# Altium PCB Connected_Cube.PcbDoc (part 2 of 4)
Units mil, origin at the board's own origin, x right, y up, seen from the top; angles counter-clockwise.
Board outline 4960.63 x 3700.79 mil, 4 copper layers (Top Layer, GND, Power, Bottom Layer), stack 47.164 mil thick; 209 components, 203 nets, 946 pads, 737 vias.
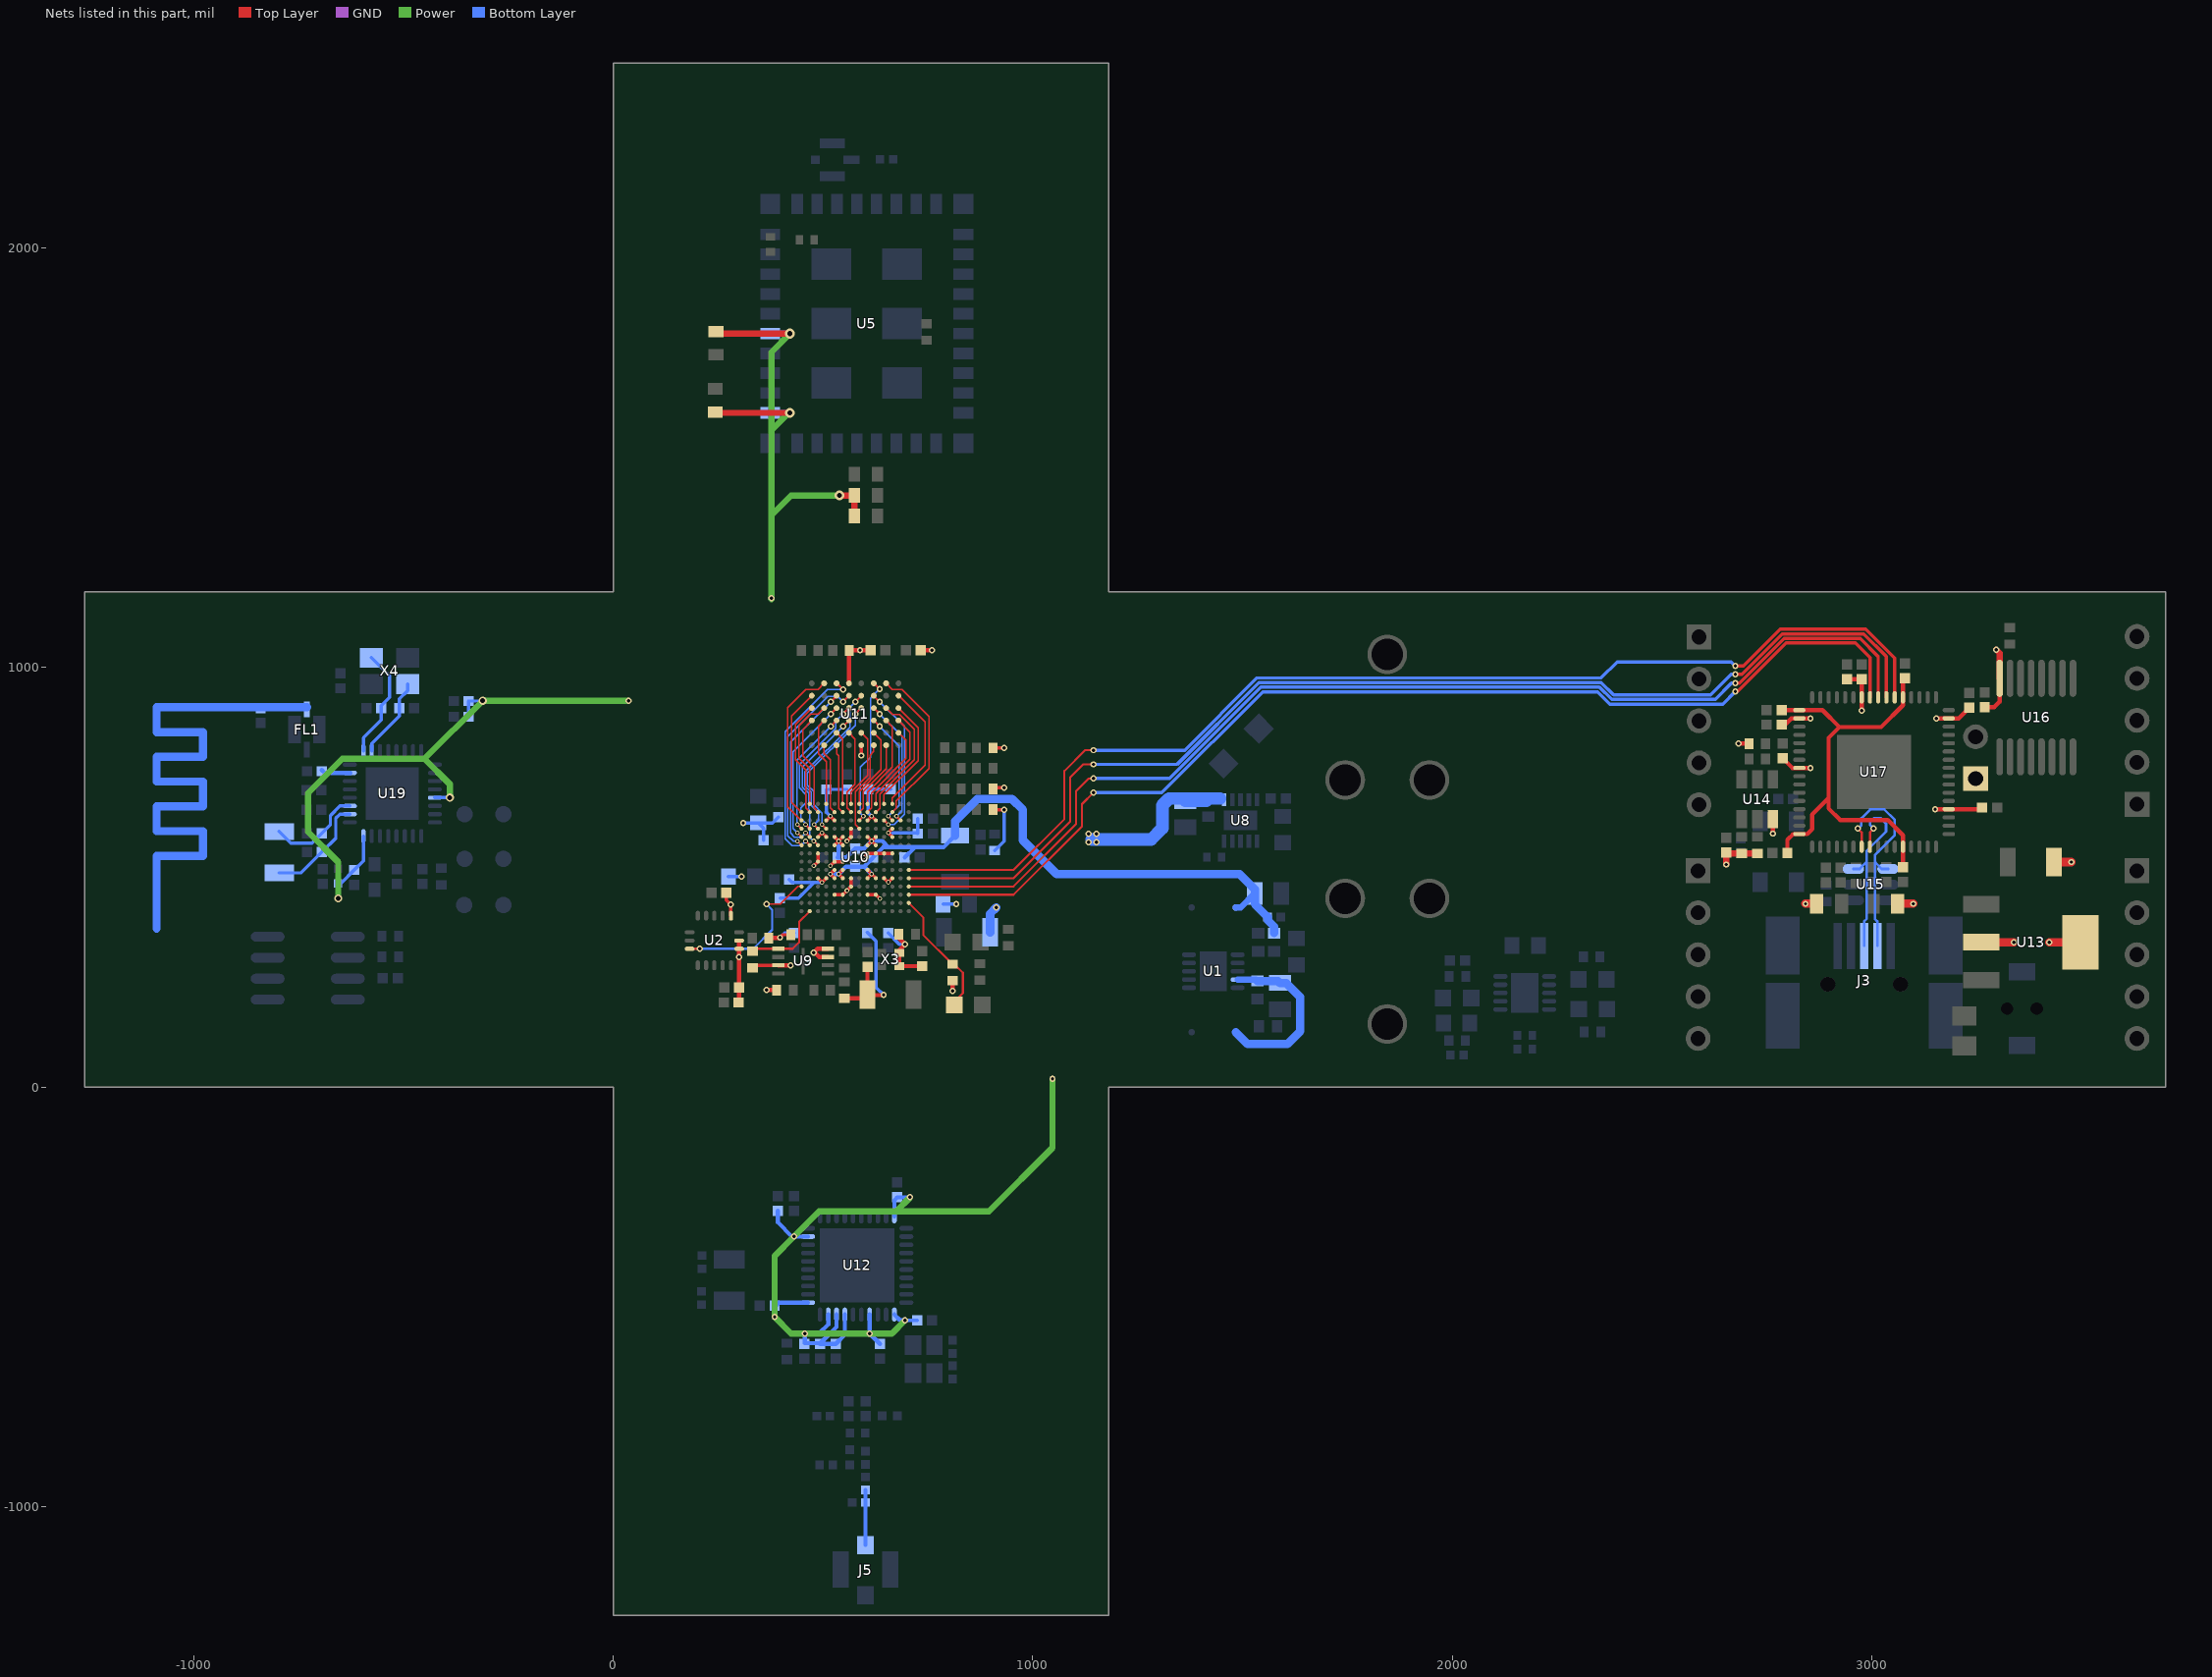
[diagram p4: the nets of this part, all layers, seen from the top]

## Part data
C1 C4 C14: library part CMP-1036-04942-1, "CAP 22uF 10V ±10% 0805 (2012 Metric) Thickness 1.45mm SMD"
C2: library part CMP-1034-00991-1, "CAP 33pF 16V ±1% 0402 (1005 Metric) Thickness 0.6mm SMD"
C3 C12: library part CMP-1035-02799-1, "CAP 10uF 10V ±10% 0603 (1608 Metric) Thickness 1mm SMD"
C5 C6 C69 C70 C71 C72 C73 C75 C76 C77: library part CMP-1034-02069-1, "CAP 100nF 16V ?0% 0402 (1005 Metric) Thickness 0.6mm SMD"
C7: library part CMP-1034-02119-1, "CAP 1uF 16V ?0% 0402 (1005 Metric) Thickness 0.6mm SMD"
C8 C48 C56: library part CMP-1034-02116-1, "CAP 1uF 10V ±10% 0402 (1005 Metric) Thickness 0.6mm SMD"
C9: library part CMP-1035-02789-1, "CAP 4.7uF 16V ±20% 0603 (1608 Metric) Thickness 1mm SMD"
C10: library part CMP-1034-02064-1, "CAP 100nF 10V ±5% 0402 (1005 Metric) Thickness 0.6mm SMD"
C11: library part CMP-1035-02762-1, "CAP 2.2uF 16V ±10% 0603 (1608 Metric) Thickness 0.55mm SMD"
C13: library part CMP-1034-02073-1, "CAP 100nF 25V ?0% 0402 (1005 Metric) Thickness 0.6mm SMD"
C15 C16: library part CMP-1034-00800-1, "CAP 15pF 16V ±1% 0402 (1005 Metric) Thickness 0.6mm SMD"
C17 C18: library part CMP-1034-00950-1, "CAP 27pF 16V ±1% 0402 (1005 Metric) Thickness 0.6mm SMD"
C19 C45: library part CMP-1034-01869-1, "CAP 10nF 6.3V ?0% 0402 (1005 Metric) Thickness 0.6mm SMD"
C20 C61: library part CMP-1034-02062-1, "CAP 100nF 6.3V ?0% 0402 (1005 Metric) Thickness 0.6mm SMD"
C21 C34 C40: library part CMP-1035-02797-1, "CAP 10uF 6.3V ?0% 0603 (1608 Metric) Thickness 1mm SMD"
C22 C25 C26 C27 C28 C31 C35 C39 C42 C64 C66 C68: library part CMP-1034-02137-1, "CAP 4.7uF 6.3V ?0% 0402 (1005 Metric) Thickness 0.6mm SMD"
C23 C24 C32 C33 C36 C37 C38 C43 C44: library part CMP-1034-02104-1, "CAP 470nF 6.3V ?0% 0402 (1005 Metric) Thickness 0.6mm SMD"
C29 C30 C41: library part CMP-1037-05005-1, "CAP 100uF 6.3V ?0% 1206 (3216 Metric) Thickness 1.9mm SMD"
C46 C47 C49 C50 C51 C52 C53 C54 C55 C65 C67: library part CMP-1034-02069-1, "CAP 100nF 16V ±10% 0402 (1005 Metric) Thickness 0.6mm SMD"
C57: library part CMP-1036-04925-1, "CAP 10uF 10V ?0% 0805 (2012 Metric) Thickness 1mm SMD"
C58: library part CMP-1037-04987-1, "CAP 22uF 6.3V ?0% 1206 (3216 Metric) Thickness 1mm SMD"
C59: library part CMP-1034-02065-1, "CAP 100nF 10V ±10% 0402 (1005 Metric) Thickness 0.6mm SMD"
C62 C63: library part CMP-1034-00963-1, "CAP 27pF 50V ±5% 0402 (1005 Metric) Thickness 0.6mm SMD"
C74: library part CMP-1034-02132-1, "CAP 3.3uF 6.3V ?0% 0402 (1005 Metric) Thickness 0.6mm SMD"
C78 C83: library part CMP-1034-00856-1, "CAP 18pF 25V ±1% 0402 (1005 Metric) Thickness 0.6mm SMD"
C79 C84: library part CMP-1034-00054-1, "CAP 1pF 25V ±0.25pF 0402 (1005 Metric) Thickness 0.6mm SMD"
C80 C81 C82: library part CMP-1034-00171-1, "CAP 2.2pF 25V ±0.25pF 0402 (1005 Metric) Thickness 0.6mm SMD"
C85: library part CMP-1034-00700-1, "CAP 10pF 10V ±1% 0402 (1005 Metric) Thickness 0.6mm SMD"
C86 C87: library part CMP-1035-02733-1, "CAP 1uF 10V ±10% 0603 (1608 Metric) Thickness 1mm SMD"
C88: library part CMP-1035-00662-1, "CAP 15pF 10V ±5% 0603 (1608 Metric) Thickness 1mm SMD"
C89: library part CMP-1034-02113-1, "CAP 1uF 6.3V ±10% 0402 (1005 Metric) Thickness 0.6mm SMD"
C90: library part CMP-1034-00899-1, "CAP 22pF 16V ±0.25pF 0402 (1005 Metric) Thickness 0.6mm SMD"
C91: library part CMP-1034-00102-1, "CAP 1.5pF 10V ±0.1pF 0402 (1005 Metric) Thickness 0.6mm SMD"
C92 C97: library part CMP-1034-02125-1, "CAP 2.2uF 6.3V ±10% 0402 (1005 Metric) Thickness 0.6mm SMD"
C93 C94 C96: library part CMP-1034-02060-1, "CAP 100nF 6.3V ±5% 0402 (1005 Metric) Thickness 0.6mm SMD"
C95 C98 C99: library part CMP-1034-02103-1, "CAP 470nF 6.3V ±10% 0402 (1005 Metric) Thickness 0.6mm SMD"
C100: library part CMP-1034-00985-1, "CAP 33pF 10V ±0.5pF 0402 (1005 Metric) Thickness 0.6mm SMD"
C101 C102: library part CMP-1034-00871-1, "CAP 20pF 10V ±0.25pF 0402 (1005 Metric) Thickness 0.6mm SMD"
C103 C104: library part CMP-1034-00923-1, "CAP 24pF 10V ±0.25pF 0402 (1005 Metric) Thickness 0.6mm SMD"
DS1: library part CMP-5037-00006-1, "LED, SMT, 0603(1608), 0.25mm thickness, Red"
DS2 DS4: library part CMP-5037-00005-1, "LED, SMT, 0603(1608), 0.25mm thickness, Super Bright Orange"
DS3 DS5: library part CMP-5037-00004-1, "LED, SMT, 0603(1608), 0.25mm thickness, Green"
FL1: library part CMP-0453-00001-1, "LFB21(0805)_SG Series Filter for Wireless LAN/Bluetooth, 2400-2500 MHz, 2 x 1.25 x 0.95 mm"
J1: "RF Connector, Onboard Receptacle, IPEX MHFIII"
J2 J6 J7 J8: library part CMP-5167-00036-1, "Male Header IDC, 1 x 5 Pin Vertical 2.54mm Pitch, 5.84mm Mated Height"
J3: library part CMP-5172-00001-1, "Connector Mini USB, Right Angle, Receptacle"
J4: library part CMP-5167-00031-1, "Male Header IDC, 1 x 2 Pin Vertical 2.54mm Pitch"
J5: library part CMP-5222-00000-1, "Microcoaxial RF, 50 Ohm, PCB Vertical Jack Receptacle, SMT, 1.25mm Mounted Height"
L1 L2: library part CMP-0462-00001-1, "Power Inductor, 2.2 uH, 1.45 Irms Max(A), SMD"
L3: library part CMP-0468-00001-1, "Power Inductor,-40 to 100 degC, 3.2 x 3.2 x 1.55 mm, SMD"
L4 L5: library part CMP-5175-00000-1, "Multilayer Inductor, 10 uH, ?0%, 300 mOhm, 50MHz, 0805(2012)"
L6 L7 L8: library part CMP-0499-00001-2, "Chip Inductor (Chip Coil) for High Frequency Multilayer, 2 +/- 0.3 nH, 300mA, 0402 (1005), 180mm Paper Tape"
L9: library part CMP-0221-00043-1, "SMD-Multilayer Inductor WE-MI, L = 4.70 µH"
L10: library part CMP-0457-00001-1, "Chip Bead for Signal Line, 1500 ohm at 100 MHz, -55 to 125 degC, 1.0 x 1.0 x 0.5 mm SMD"
R1: library part CMP-1011-00800-1, "374K 0.063W 1% 0402 (1005 Metric)  SMD"
R2 R3 R4: library part CMP-1011-00765-1, "187K 0.063W 1% 0402 (1005 Metric)  SMD"
R5 R6 R7 R25 R35 R36: library part CMP-1011-00062-1, "330R 0.063W 5% 0402 (1005 Metric)  SMD"
R8: library part CMP-1011-00534-1, "1K69 0.063W 1% 0402 (1005 Metric)  SMD"
R9: library part CMP-1011-00706-1, "53K6 0.063W 1% 0402 (1005 Metric)  SMD"
R10: library part CMP-1011-00636-1, "13K3 0.063W 1% 0402 (1005 Metric)  SMD"
R11: library part CMP-1011-00849-1, "1M 0.063W 1% 0402 (1005 Metric)  SMD"
R12: library part CMP-1011-00762-1, "178K 0.063W 1% 0402 (1005 Metric)  SMD"
R13 R17 R24 R38: library part CMP-1011-00623-1, "10K 0.063W 1% 0402 (1005 Metric)  SMD"
R14: library part CMP-1011-00510-1, "1K 0.063W 1% 0402 (1005 Metric)  SMD"
R15: library part CMP-1011-00100-1, "12K 0.063W 5% 0402 (1005 Metric)  SMD"
R16 R18 R41 R42: library part CMP-1011-00098-1, "10K 0.063W 5% 0402 (1005 Metric)  SMD"
R19 R31 R32 R33 R34: library part CMP-1011-00363-1, "49R9 0.063W 1% 0402 (1005 Metric)  SMD"
R20 R26 R27 R28 R29 R37 R51 R52: library part CMP-1011-00090-1, "4K7 0.063W 5% 0402 (1005 Metric)  SMD"
R21 R23: library part CMP-1011-00050-1, "100R 0.063W 5% 0402 (1005 Metric)  SMD"
R22 R30: library part CMP-1011-00074-1, "1K 0.063W 5% 0402 (1005 Metric)  SMD"
R39 R46 R47 R50 R53: library part CMP-1011-00001-1, "Jumper 0402 (1005 Metric)"
R40: library part CMP-1011-00708-1, "56K 0.063W 1% 0402 (1005 Metric)  SMD"
R43: library part CMP-1011-00082-1, "2K2 0.063W 5% 0402 (1005 Metric)  SMD"
R48: library part CMP-1012-00098-1, "10K 0.1W 5% 0603 (1608 Metric)  SMD"
R49: library part CMP-1012-00090-1, "4K7 0.1W 5% 0603 (1608 Metric)  SMD"
SW5: library part CMP-5298-00001-1, "Switch, SPST Push Button, 50mA, 12V DC, SMD"
TP1 TP2 TP3 TP4 TP5 TP6: library part CMP-0484-00002-1, "Test Point, Surface Mount, Circular, Pad Diameter 1 mm"
U1: library part CMP-0323-00305-2, "Buck Adjustable Regulator with 2.5 to 6 V Input and 0.6 to 6 V Output, -40 to 85 degC, 10-Pin SON (DRC), Green (RoHS & no Sb/Br)"
U2: library part CMP-0234-00061-2, "MEMS motion sensor 3-axis - ± 2g/± 8g smart digital output nano accelerometer, -40 to +85°C, LGA-16 (3x3x1), Tape and Reel"
U4 U6: library part CMP-0466-00001-1, "PC Battery Clip, Catalog No.54, Spring Steel, Body 18.102 x 13.004 mm, THM"
U5: library part CMP-0276-00001-1, "SimpleLink Wi-Fi Module"
U7: library part CMP-0321-00536-1, "bqTINY (TM) Linear 1-Cell Li-Ion Charger with 1 A FET, AC Present and Temp Sense in QFN-10, 3 V, -40 to 85 degC, 10-pin SON (DRC), Green (RoHS & no Sb/Br)"
U8: library part CMP-0349-00012-1, "High Efficiency Single Inductor Buck-Boost Converter with 1-A Switch,1.2 to 5.5 V Output, -40 to 85 degC, 10-pin SON (DSK), Green(RoHS & no Sb/Br)"
U9: library part CMP-0467-00001-1, "4 M-Bit [x1 / x2] CMOS Serial Flash, 86 MHz, -0.7 to 3.6 V, -40 to 85 degC, Body 2 x 3 x 0.6 mm"
U10: library part CMP-0067-00328-1, "Spartan-6 LX 1.2V FPGA, 106 User I/Os, 196-Ball Chip-Scale BGA (0.5mm Pitch), Speed Grade 2, Commercial Grade, Pb-Free"
U11: library part CMP-5069-00000-1, "256K x 16 High speed asynchronous CMOS Static RAM"
U12: library part CMP-0458-00002-1, "CC2530 System-on-Chip Solution for 2.4-GHz IEEE 802.15.4 and ZigBee Applications"
U13: library part CMP-5296-00001-1, "Low-dropout linear regulator, 3.3V Output, SOT223"
U14: library part CMP-0162-00356-1, "2K, 128x16-bit, 2.5V Microwire Serial EEPROM, 6-Pin SOT-23, Industrial Temperature, Tape and Reel"
U15: library part CMP-5150-00000-1, "IC TVS DIODE ARRAY HS LINE 6TSOP"
U16: library part CMP-5097-00006-1, "IC QUAD 1:2 FET MUX/DEMUX 16SSOP"
U17: library part CMP-0078-00003-2, "Dual High Speed USB To Multipurpose UART/FIFO IC, QFN-64, Tray"
U18: library part CMP-0159-01018-1, "512K bits I2C™ Serial EEPROM, 1.7 to 5.5 V, 400 kHz, -40 to 85 degC, 8-pin SOIC (SN8), Tube"
U19: library part CMP-0450-00001-1, "Bluetooth Low Energy Single-mode IC, 64 KB RAM and 64 KB ROM, -30 to 85 degC, 32-pin QFN"
X1: library part CMP-0447-00001-1, "Crystal, 32.768 kHz, 12.5 pF, -40 to 85 degC, SMD Low Profile 3.2 x 1.5 x 0.9 mm, Tape and Reel"
X2: library part CMP-0449-00001-1, "Crystal, 32 MHz, 8 pF, -10 to 70 degC, Surface Mount 2.5 x 2.0 mm"
X3: library part CMP-0461-00001-1, "Crystal Clock Oscillator, 50 MHz, -20 to 70 degC, 1.6 x 1.2 x 0.7 mm SMD"
X4: library part CMP-0464-00001-1, "Crystal, 16 MHz, -30 to 85 degC, 3.2 x 2.5 x 0.9 mm SMD"
X5: library part CMP-0463-00001-1, "Crystal, 32.768 KHz, -40 to 85 degC, 3.2 x 1.5 x 0.9 mm SMD"
Y1: library part CMP-5195-00000-1, "Crystal, SMD, 12MHz, 10.0pF"

## Via types
v1: diameter 15, hole 8, Top Layer to Bottom Layer, tented both sides, 313 vias
v2: diameter 19.68, hole 11.81, Top Layer to Bottom Layer, tented both sides, 269 vias
v3: diameter 11, hole 6, Top Layer to Bottom Layer, tented both sides, 78 vias
v4: diameter 23.62, hole 11.81, Top Layer to Bottom Layer, tented both sides, 37 vias
v5: diameter 19.68, hole 7.87, Top Layer to Bottom Layer, tented both sides, 35 vias
v6: diameter 15.75, hole 11.81, Top Layer to Bottom Layer, tented both sides, 5 vias

## Nets (pads, with @x,y where several pads share a name; then routed paths per layer and width w, separated by ;. In a path a pad name is that pad's centre, name@x,y a point inside that pad or via, vN(x,y) a via of type N, cw(c..) or ccw(c..) an arc to the next point about the centre after c; other vN are vias at no path point)
1V2: C2.2 C4.2 C24.2 C25.2 C26.2 C27.2 C28.1 C29.2 L2.2 R2.2 U10.E5 U10.E6 U10.E9 U10.E10 U10.F5 U10.F6 U10.F9 U10.F10 U10.J5 U10.J6 U10.J9 U10.K5 U10.K6 U10.K9 U10.K10 | length 1873.9
  Top Layer w8: U10.K5@527.6,497.95 v3(517.75,507.79) U10.J5@527.6,517.64 ; U10.F5@527.6,576.69 v3(537.44,586.54) ; U10.E5@527.6,596.38 v3(537.44,586.54) ; U10.K6@547.28,497.95 v3(537.44,507.79) U10.J6@547.28,517.64 ; U10.F6@547.28,576.69 v3(537.44,586.54) ; U10.E6@547.28,596.38 v3(537.44,586.54) ; U10.K9@606.34,497.95 v3(616.18,507.79) ; U10.J9@606.34,517.64 v3(616.18,507.79) ; U10.F9@606.34,576.69 v3(616.18,586.54) ; U10.E9@606.34,596.38 v3(616.18,586.54) ; U10.K10@626.02,497.95 v3(616.18,507.79) ; U10.F10@626.02,576.69 v3(616.18,586.54) ; U10.E10@626.02,596.38 v3(616.18,586.54)
  Bottom Layer w10: v3(517.75,507.79) v3(537.44,507.79) 555.24,525.59 C27.2@576.77,525.59 598.39,525.59 ; v3(537.44,586.54) 537.44,549.25 C26.2@535.43,547.24 555.12,547.24 C25.2@576.77,568.9 598.54,568.9 v3(616.18,586.54) 641.77,586.54 656.46,571.85 ; v3(616.18,507.79) 598.39,525.59 ; C24.2@694.88,547.24 694.88,547.53 719.2,571.85 ; C29.2@814.96,599.41 787.4,571.85 719.2,571.85 ; 598.39,525.59 619.09,546.3 C28.1@619.09,547.24 619.09,547.53 643.41,571.85 656.46,571.85 ; 656.46,571.85 719.2,571.85
  Bottom Layer w15: L2.2@1484.1,428.15 1496.06,428.15 C4.2@1529.53,461.61
  Bottom Layer w20: C29.2@814.96,599.41 814.96,633.86 868.11,687.01 950.79,687.01 976.38,661.42 976.38,588.58 1057.09,507.87 1493.11,507.87 1529.53,471.46 C4.2@1529.53,461.61 1529.53,436.02 C2.2@1560.04,405.51 1560.04,398.15 1575.94,382.25 R2.2@1575.94,367.13
1V8: C1.2 L1.2 R1.2 U1.4 | length 426.3
  Bottom Layer w15: U1.4@1488.7,256.41 1531.97,256.41 R1.2@1535.43,252.95
  Bottom Layer w20: L1.2@1484.1,130.91 1512.65,102.36 1607.28,102.36 1637.8,132.87 1637.8,214.57 1604.33,248.03 C1.2@1589.57,248.03 1584.65,252.95 R1.2@1535.43,252.95
1V8_FT: C74.2 C75.1 C76.1 C77.1 U17.12 U17.37 U17.49 U17.64 | length 1074.1
  Top Layer w10: C74.2@2785.43,898.62 U17.49@2827.76,898.62 2882.87,898.62 2923.23,858.27 ; C76.1@2799.21,558.07 2799.21,589.57 2812.99,603.35 U17.64@2827.76,603.35 2846.46,603.35 2858.27,615.16 2858.27,649.61 2897.64,688.98 ; C77.1@3071.85,524.61 3074.8,527.56 U17.12@3074.8,572.83 3074.8,600.39 3038.39,636.81 2925.2,636.81 2897.64,664.37 2897.64,688.98 ; C75.1@3074.8,973.42 C75.1@3074.8,969.49 ; C75.1@3079.72,974.41 C75.1@3074.8,969.49 ; 2897.64,688.98 2897.64,832.68 2923.23,858.27 ; 2923.23,858.27 3022.64,858.27 3074.8,910.43 U17.37@3074.8,929.13 C75.1@3074.8,969.49
3V3: C5.1 C6.1 C7.2 C14.2 C19.1 C20.2 C21.2 C22.1 C23.2 C30.2 C31.2 C32.2 C33.2 C34.2 C35.1 C36.2 C37.2 C38.2 C39.1 C40.2 C41.1 C42.2 C43.2 C44.2 C46.2 C47.2 C48.2 C49.2 C50.2 C51.2 C52.2 C53.2 C54.2 C55.2 C86.2 C87.2 C92.2 C93.2 C94.2 L10.1 R11.2 R17.1 R18.1 R20.2 R21.2 R24.2 R25.1 R26.2 R27.2 R28.2 R29.2 R37.2 R38.2 R48.2 R49.2 U2.1 U2.14 U2.15 U5.19 U5.23 U8.1 U9.3 U9.7 U9.8 U10.C4 U10.C5 U10.C9 U10.C10 U10.D7 U10.D12 U10.E3 U10.E4 U10.E7 U10.E12 U10.G3 U10.G9 U10.G10 U10.G11 U10.G12 U10.H3 U10.H5 U10.H6 U10.K3 U10.K4 U10.K7 U10.K11 U10.K12 U10.L7 U10.M5 U10.M6 U10.M9 U10.M10 U11.D6 U11.E1 U12.10 U12.21 U12.24 U12.27 U12.28 U12.29 U12.31 U12.39 U19.21 U19.32 X3.1 X3.4 | length 8282.6
  Top Layer w5: U10.G9@606.34,556.69 U10.G9@606.34,557.01
  Top Layer w8: C7.2@269.69,463.58 269.69,445.87 v1(280.51,435.04) U2.1@280.51,408.46 ; R24.2@332.68,284.45 338.58,290.35 U9.3@393.7,290.35 ; v1@396.65,355.32 v1(397.64,356.3) 404.53,363.19 R37.2@423.23,363.19 ; v3(478.38,527.48) U10.H3@488.23,537.32 U10.G3@488.23,557.01 ; U10.K3@488.23,497.95 v3(498.07,488.11) U10.K4@507.91,497.95 ; U10.E3@488.23,596.38 v3(498.07,606.22) U10.E4@507.91,596.38 ; U10.C4@507.91,635.75 v3(517.75,645.59) U10.C5@527.6,635.75 ; v3(517.75,527.48) U10.H5@527.6,537.32 U10.H6@547.28,537.32 ; U10.M5@527.6,458.58 U10.M6@547.28,458.58 v3(557.12,468.42) U10.L7@566.97,478.27 U10.K7@566.97,497.95 ; v3(557.09,586.61) 566.85,596.38 U10.E7@566.97,596.38 U10.D7@566.97,616.06 ; v1(591.54,790.35) U11.E1@591.54,814.96 ; v3(596.81,547.17) U10.G9@606.34,556.69 ; U10.M9@606.34,458.58 U10.M10@626.02,458.58 v3@635.87,448.74 ; U10.G9@606.34,557.01 U10.G10@626.02,557.01 U10.G11@645.71,557.01 U10.G12@665.39,557.01 ; U10.C9@606.34,635.75 v3(616.18,645.59) U10.C10@626.02,635.75 ; U10.K11@645.71,497.95 655.55,488.11 U10.K12@665.39,497.95 ; U10.E12@665.39,596.38 655.51,606.22 U10.D12@665.39,616.06 ; R28.2@905.52,661.42 v1(932.09,661.42) ; R27.2@905.52,710.79 908.46,713.74 v1(932.09,713.74) ; R29.2@905.51,808.54 v1@929.13,808.54
  Top Layer w10: C5.1@299.21,201.77 300.2,202.76 C6.1@300.2,237.2 v1(300.2,310.04) U2.14@300.2,329.72 U2.15@300.2,349.41 ; v1(365.16,231.3) R21.2@389.76,231.3 R21.2@394.2,231.3 ; R26.2@371.06,355.32 v1@396.65,355.32 ; U9.3@393.7,290.35 v1(423.23,290.35) ; v1(478.35,320.87) v1@479.33,321.85 ; U9.7@511.81,310.04 491.14,310.04 v1@479.33,321.85 ; U9.8@511.81,329.72 487.2,329.72 v1@479.33,321.85 ; R18.1@551.18,211.61 591.53,211.61 C41.1@604.33,224.41 ; U11.D6@562.01,962.6 562.01,1040.35 R38.2@562.99,1041.34 C47.2@606.3,1041.34 ; C19.1@606.3,286.42 606.3,226.38 C41.1@604.33,224.41 ; C47.2@613.19,1041.05 C47.2@613.19,1041.34 ; v1(644.68,219.49) 609.25,219.49 C41.1@604.33,224.41 ; R20.2@681.1,364.17 682.09,363.19 682.09,354.33 v1(695.87,340.55) 682.09,326.77 X3.1@682.09,319.88 682.09,290.35 684.06,288.39 C20.2@736.22,288.39 ; C46.2@733.27,1041.05 C46.2@733.27,1041.34 v1(759.84,1041.34) ; v1(809.06,229.17) R25.1@809.06,253.78
  Top Layer w15: C86.2@243.11,1609.25 245.08,1607.28 v4(421.26,1607.28) ; C87.2@245.08,1801.18 250,1796.26 v4(421.26,1796.26) ; v4@542.32,1410.43 R49.2@574.8,1410.43 R48.2@574.8,1361.22
  Power w15: v2(-655.51,449.8) -655.51,536.42 -727.36,608.27 -727.36,700.79 -645.67,782.48 -449.8,782.48 ; v2(-389.76,689.96) -389.76,722.44 -449.8,782.48 ; v1@35.43,921.26 v2(-311.02,921.26) -449.8,782.48 ; v1@376.97,1163.39 v1(376.97,1165.35) 376.97,1363.19 ; v4@418.31,1607.28 376.97,1565.94 ; v4(421.26,1796.26) 376.97,1751.97 376.97,1565.94 ; v4(539.37,1410.43) 424.21,1410.43 376.97,1363.19 ; v1(695.87,-556.1) 664.37,-587.6 v1(611.22,-587.6) 424.21,-587.6 v1(384.84,-548.23) 384.84,-402.56 v1(431.1,-356.3) 491.14,-296.26 674.21,-296.26 ; v1(707.68,-262.8) 674.21,-296.26 ; v1(1047.24,19.68) 1047.24,-144.68 895.67,-296.26 674.21,-296.26 ; 376.97,1363.19 376.97,1565.94
  Bottom Layer w7.87: L10.1@-656.5,485.24 -649.61,485.24 C92.2@-617.13,517.72 -595.47,539.37 U19.32@-595.47,598.42 ; v2(-655.51,449.8) L10.1@-655.51,484.25 ; U19.21@-425.2,689.96 v2(-389.76,689.96) ; C93.2@-344.49,882.87 C94.2@-344.49,920.28 -312.01,920.28 v2(-311.02,921.26)
  Bottom Layer w8: C21.2@274.61,501.97 v1(306.1,501.97) ; v1(310.04,629.92) C40.2@345.47,629.92 ; C43.2@358.27,588.58 358.27,617.13 C40.2@345.47,629.92 ; C44.2@393.7,643.7 379.92,629.92 C40.2@345.47,629.92 ; v1(397.64,356.3) 408.46,367.13 C31.2@431.1,367.13 ; C37.2@397.64,450.79 441.93,450.79 479.25,488.11 ; C42.2@419.29,495.08 426.26,488.11 479.25,488.11 ; v3(498.07,488.11) 479.25,488.11 ; v3(517.75,645.59) 507.87,655.47 C38.2@507.87,709.65 C39.1@558.07,709.65 ; v1(591.54,790.35) v1@591.6,790.42 ; C23.2@605.32,369.09 626.33,348.08 626.33,237.85 v1(644.68,219.49) ; v3(616.18,645.59) 608.27,653.51 C33.2@608.27,710.63 C32.2@661.42,710.63 ; C22.1@655.51,367.13 682.09,340.55 v1(695.87,340.55) ; v3@655.51,606.22 724.49,606.22 C36.2@726.38,604.33 C35.1@726.38,639.76 ; v1(695.87,-556.1) C50.2@724.41,-556.1 ; C34.2@786.42,436.02 v1(817.91,436.02) ; R17.1@909.45,563.98 932.09,586.61 v1(932.09,661.42) ; v1@932.09,713.58 932.01,713.66 v1(932.09,713.74)
  Bottom Layer w10: L10.1@-656.5,485.24 L10.1@-655.51,484.25 ; v1(384.84,-548.23) 384.84,-524.61 395.67,-513.78 U12.31@464.57,-513.78 ; C48.2@392.72,-295.28 392.72,-322.83 426.18,-356.3 v1(431.1,-356.3) U12.39@464.57,-356.3 ; C54.2@493.11,-612.2 C54.2@493.11,-611.22 ; U12.29@512.8,-542.32 512.8,-565.95 492.13,-586.61 456.69,-586.61 456.69,-610.24 492.13,-610.24 C54.2@493.11,-611.22 ; U12.28@532.48,-542.32 532.48,-571.85 C54.2@493.11,-611.22 ; U12.27@552.17,-542.32 552.17,-590.55 C53.2@530.51,-612.2 494.09,-612.2 C54.2@493.11,-611.22 ; U12.24@611.22,-542.32 v1(611.22,-587.6) C55.2@635.83,-612.2 ; U12.21@670.28,-542.32 684.06,-556.1 v1(695.87,-556.1) ; U12.10@670.28,-308.07 670.28,-269.68 C49.2@677.17,-262.8 v1(707.68,-262.8)
  Bottom Layer w15: U5.19@374.02,1607.28 v4(421.26,1607.28) ; U5.23@374.02,1796.26 v4(421.26,1796.26)
  Bottom Layer w20: C30.2@898.62,369.09 898.62,413.39 v1(913.39,428.15)
  Bottom Layer w30: 1140.75,590.55 1282.48,590.55 1309.06,617.13 1309.06,671.64 1325.4,687.99 R11.2@1419.29,687.99 1446.85,687.99 ; C14.2@1364.17,682.09 R11.2@1413.39,682.09
  other v1: 456.69,-587.6 1132.87,583.66 1151.57,583.66 1132.87,603.35 1151.57,603.35 932.09,808.54 36.42,921.26 588.58,1041.34
  other v3: 635.87,449 655.55,488.5 655.51,606
3V3_FT: C58.2 C59.1 C61.2 C68.1 C69.1 C70.1 C71.1 C72.1 C73.1 J4.1 L4.1 L5.1 R16.2 R41.2 R42.2 U13.2 U13.4 U14.6 U16.16 U17.20 U17.31 U17.42 U17.50 U17.56 | length 1061.9
  Top Layer w10: v1(2683.07,818.9) R42.2@2707.68,818.9 ; v1(2764.76,604.33) U14.6@2764.76,638.78 ; C61.2@2785.43,864.17 2793.83,864.17 2808.59,878.94 U17.50@2827.76,878.94 v1(2854.33,878.94) ; C73.1@2788.39,783.46 2811.02,760.83 U17.56@2827.76,760.83 v1(2854.33,760.83) ; C68.1@2940.94,972.44 C71.1@2976.38,972.44 U17.42@2976.38,929.13 v1(2976.38,897.64) ; v1(3151.57,662.4) U17.20@3184.06,662.4 3254.92,662.4 C72.1@3260.83,668.31 ; v1(3154.53,878.94) U17.31@3184.06,878.94 3207.68,878.94 C69.1@3233.27,904.53 C69.1@3234.25,905.51 ; C70.1@3269.68,905.51 3292.32,905.51 3305.22,918.41 U16.16@3305.22,974.41
  Top Layer w15: v1(2653.54,530.51) C59.1@2653.54,559.06 2655.51,557.09 R41.2@2689.96,557.09 R16.2@2728.35,557.09 ; v1(3297.24,1042.32) 3305.22,1034.35 U16.16@3305.22,974.41
  Top Layer w20: v1(2842.52,437.01) L4.1@2869.09,437.01 ; L5.1@3062.01,430.12 L5.1@3062.01,437.01 v1(3099.41,437.01) ; U13.2@3261.81,345.47 v1(3339.57,345.47) ; v1(3423.23,345.47) U13.4@3498.03,345.47 ; C58.2@3435.04,536.42 v1(3476.38,536.42)
  GND w10: v1(2764.76,604.33) v1@2766.73,602.36
16M_IN: C101.1 U19.10 X4.1 | length 194.9
  Bottom Layer w7.87: U19.10@-575.79,801.18 -575.79,818.9 -509.84,884.84 C101.1@-509.84,903.54 -509.84,925.2 -490.16,944.88 X4.1@-490.16,960.63
16M_OUT: C102.1 U19.9 X4.3 | length 266.1
  Bottom Layer w7.87: U19.9@-595.47,801.18 -595.47,832.68 -553.15,875 C102.1@-553.15,903.54 -553.15,909.45 -533.46,929.13 -533.46,980.32 X4.3@-576.77,1023.62
32.768K_IN: C103.2 U19.3 X5.2 | length 229.1
  Bottom Layer w7.87: X5.2@-796.26,609.25 -768.7,581.69 -718.5,581.69 C103.2@-694.88,605.31 -674.21,625.98 -674.21,647.64 -651.58,670.28 U19.3@-627.95,670.28
32.768K_OUT: C104.2 U19.2 X5.1 | length 253.9
  Bottom Layer w7.87: X5.1@-796.26,510.83 -744.09,510.83 C104.2@-694.88,560.04 -661.42,593.5 -661.42,640.75 -651.57,650.59 U19.2@-627.95,650.59
A0: U10.B3 U11.A3 | length 242.7
  Top Layer w3: U11.A3@473.43,874.02 451.77,852.36 451.77,789.37 478.81,762.33 478.81,665.7 488.23,656.28 U10.B3@488.23,655.43
A1: U10.B2 U11.A4 | length 278.7
  Top Layer w3: U10.B2@468.54,655.43 468.54,656.28 459.12,665.7 459.12,755.44 434.06,780.51 434.06,864.17 U11.A4@473.43,903.54
A2: U10.B1 U11.A5 | length 307.4
  Top Layer w3: U10.B1@448.86,655.43 425.2,679.09 425.2,884.84 U11.A5@473.43,933.07
A3: U10.A4 U11.B3 | length 212.4
  Top Layer w3: U11.B3@502.95,874.02 489.17,860.24 489.17,794.29 507.91,775.55 U10.A4@507.91,675.12
A4: U10.A2 U11.B4 | length 274.3
  Top Layer w3: U10.A2@468.54,675.12 468.54,758.82 442.91,784.45 442.91,861.22 470.47,888.78 488.19,888.78 U11.B4@502.95,903.54
A5: U10.D1 U11.C3 | length 301.6
  Top Layer w5: v3(439.01,625.91) U10.D1@448.86,616.06 ; v1(518.7,860.24) U11.C3@532.48,874.02
  Bottom Layer w3: v3(439.01,625.91) 437.99,626.93 437.99,779.53 v1(518.7,860.24)
A6: U10.E1 U11.C4 | length 358.7
  Top Layer w5: v3@439.01,606.22 U10.E1@448.86,596.38 ; v1(518.7,889.76) U11.C4@532.48,903.54
  Bottom Layer w3: v3(439.01,606.3) 428.41,616.91 428.41,799.47 v1(518.7,889.76)
A7: U10.D2 U11.D4 | length 356.4
  Top Layer w5: v3@458.7,625.91 U10.D2@468.54,616.06 ; v1(547.9,889.76) 561.68,903.54 U11.D4@562.01,903.54
  Bottom Layer w3: v3(458.66,625.98) 458.66,627.95 447.83,638.78 447.83,665.35 459.65,677.17 459.65,697.83 443.99,713.49 443.99,768.56 530.7,855.27 530.7,872.56 v1(547.9,889.76)
A8: U10.B9 U11.H2 | length 234.3
  Top Layer w3: U10.B9@606.34,655.43 606.34,656.28 615.76,665.7 615.76,701.39 697.83,783.46 697.83,826.77 U11.H2@680.12,844.49
A9: U10.A10 U11.H3 | length 244.1
  Top Layer w3: U10.A10@626.02,675.12 626.02,699.84 707.68,781.5 707.68,846.46 U11.H3@680.12,874.02
A10: U10.A11 U11.H4 | length 281.8
  Top Layer w3: U10.A11@645.71,675.12 645.71,696.89 727.36,778.54 727.36,856.3 U11.H4@680.12,903.54
A11: U10.A12 U11.H5 | length 317.6
  Top Layer w3: U10.A12@665.39,675.12 665.39,689.02 744.09,767.72 744.09,870.08 681.1,933.07 U11.H5@680.12,933.07
A12: U10.A9 U11.G3 | length 229.5
  Top Layer w3: U10.A9@606.34,675.12 606.34,703.78 665.35,762.8 665.35,859.25 U11.G3@650.59,874.02
A13: U10.B10 U11.G4 | length 323.5
  Top Layer w3: U10.B10@626.02,655.43 635.44,664.85 635.44,698.44 717.52,780.51 717.52,853.35 683.07,887.8 666.34,887.8 U11.G4@650.59,903.54
A14: U10.C12 U11.F3 | length 278.9
  Top Layer w5: U11.F3@621.06,874.02 621.52,874.02 v1(635.3,860.24) ; v3(655.55,645.59) U10.C12@665.39,635.75
  Bottom Layer w3: v1(635.3,860.24) 682.09,813.45 682.09,672.13 v3(655.55,645.59)
A15: U10.C13 U11.F4 | length 305.2
  Top Layer w5: U11.F4@621.06,903.54 621.52,903.54 v1(635.3,889.76) ; v3(675.24,645.59) U10.C13@685.08,635.75
  Bottom Layer w3: v1(635.3,889.76) 688.09,836.98 688.09,658.44 v3(675.24,645.59)
A16: U10.D4 U11.E4 | length 359.9
  Top Layer w5: v3(498.07,625.91) U10.D4@507.91,616.06 ; v1(577.1,889.76) 590.88,903.54 U11.E4@591.54,903.54
  Bottom Layer w3: v3(498.07,625.91) 498.07,653.13 477.65,673.56 477.65,705.29 462.79,720.15 462.79,748.59 577.1,862.91 v1(577.1,889.76)
A17: U10.F3 U11.D3 | length 360.2
  Top Layer w5: v3(478.38,586.54) U10.F3@488.23,576.69 ; v1@547.24,859.25 U11.D3@562.01,874.02
  Bottom Layer w3: v3(478.38,586.54) 469,595.92 469,659.05 465.65,662.4 465.65,700.32 450.79,715.18 450.79,763.12 v1(547.9,860.24)
ACM_CS: U2.8 U10.L1 | length 383.5
  Top Layer w3: v1(365.16,436.02) 398.38,436.02 440.63,478.27 U10.L1@448.86,478.27
  Top Layer w5: U2.8@182.09,329.72 v1(206.69,329.72)
  Bottom Layer w5: v1(206.69,329.72) 333.66,329.72 378.94,375 378.94,422.24 v1(365.16,436.02)
ANT: C80.2 C82.2 J5.1 | length 130.9
  Bottom Layer w10: J5.1@601.38,-1091.54 C82.2@601.38,-990.16 C80.2@601.38,-960.63
ANT_RF: C91.2 FL1.2 | length 1547.2
  Bottom Layer w19.68: -1088.58,377.95 -1088.58,551.18 -978.35,551.18 -978.35,610.24 -1088.58,610.24 -1088.58,669.29 -978.35,669.29 -978.35,728.35 -1088.58,728.35 -1088.58,787.4 -978.35,787.4 -978.35,846.46 -1088.58,846.46 -1088.58,905.51 -853.35,905.51 -822.83,905.51 FL1.2@-730.31,905.51
BT_RF: C90.1 U19.7 | length 71.8
  Bottom Layer w9.84: C90.1@-694.88,755.91 -687.99,749.02 U19.7@-625.98,749.02
CS_N: U10.M14 U17.41 | length 2704.1
  Top Layer w5: U10.M14@704.76,458.58 954.51,458.58 1117.57,621.65 1117.57,674.66 v1(1144.68,701.77)
  Top Layer w8: v1(2675.2,942.91) 2680.53,942.91 2796.15,1058.54 2961.15,1058.54 2996.06,1023.62 U17.41@2996.06,929.13
  Bottom Layer w8: v1(1144.68,701.77) 1308.07,701.77 1548.69,942.39 2346.46,942.39 2375.81,913.04 2645.32,913.04 v1(2675.2,942.91)
D0: U10.C1 U11.B6 | length 392.9
  Top Layer w3: U10.C1@448.86,635.75 416.34,668.27 416.34,904.53 459.65,947.83 488.19,947.83 U11.B6@502.95,962.6
D1: U10.E2 U11.C5 | length 431.2
  Top Layer w5: v3@458.7,606.22 U10.E2@468.54,596.38 ; v1(518.7,918.31) 532.48,932.09 U11.C5@532.48,933.07
  Bottom Layer w3: v3(458.66,606.3) 448.36,596 432.54,596 422.41,606.14 422.41,822.01 v1(518.7,918.31)
D2: U10.F2 U11.C6 | length 530.5
  Top Layer w5: v3(458.66,586.61) U10.F2@468.54,576.69 ; U11.C6@532.48,962.6 533.46,962.6 v1(548.23,947.83)
  Bottom Layer w3: v3(458.66,586.61) 447.83,575.79 426.18,575.79 410.41,591.56 410.41,847.47 510.77,947.83 v1(548.23,947.83)
D3: U10.F1 U11.D5 | length 475.1
  Top Layer w3: U10.F1@448.32,576.69 U10.F1@448.86,576.69
  Top Layer w5: v3(439.01,586) U10.F1@448.32,576.69 ; v1(547.9,918.31) 547.9,918.96 U11.D5@562.01,933.07
  Bottom Layer w3: v3(439.01,586) 429.75,586 416.41,599.34 416.41,835.7 511.81,931.1 535.1,931.1 v1(547.9,918.31)
D4: U10.D3 U11.E5 | length 394.5
  Top Layer w5: v3@478.38,625.91 U10.D3@488.23,616.06 ; v1(577.1,918.31) 591.54,932.74 U11.E5@591.54,933.07
  Bottom Layer w3: v3(479,625.91) 489.17,636.08 489.17,653.54 471.65,671.07 471.65,702.8 456.79,717.66 456.79,751.08 563.98,858.27 563.98,905.18 v1(577.1,918.31)
D5: U10.C11 U11.F5 | length 375.6
  Top Layer w5: U11.F5@621.06,933.07 621.06,932.54 v1(635.3,918.31) ; U10.C11@645.71,635.75 v3@655.55,625.91
  Bottom Layer w3: v1(635.3,918.31) 694.09,859.52 694.09,650.3 669.69,625.91 v3@655.55,625.91
  other v3: 655.55,626
D6: U10.C8 U11.F6 | length 359.9
  Top Layer w5: U10.C8@586.65,635.75 v3(596.5,645.59) ; U11.F6@620.08,962.6 U11.F6@621.06,962.6 621.52,962.6 v1(635.3,948.82)
  Bottom Layer w3: v3(596.5,645.59) 589.57,652.52 589.57,762.8 613.19,786.42 613.19,926.71 v1(635.3,948.82)
D7: U10.B12 U11.G6 | length 399.1
  Top Layer w3: U11.G6@650.59,962.6 665.35,947.83 687.99,947.83 752.95,882.87 752.95,759.84 674.82,681.7 674.82,664.85 U10.B12@665.39,655.43
D8: U10.B5 U11.B1 | length 169.7
  Top Layer w3: U11.B1@502.95,814.96 502.95,795.28 518.18,780.05 518.18,665.7 527.6,656.28 U10.B5@527.6,655.43
D9: U10.B6 U11.C1 | length 165.7
  Top Layer w3: U11.C1@532.48,814.96 532.48,794.75 537.86,789.37 537.86,664.85 U10.B6@547.28,655.43
D10: U10.A6 U11.C2 | length 175.5
  Top Layer w3: U11.C2@532.48,844.49 547.24,829.72 547.24,675.16 U10.A6@547.28,675.12
D11: U10.B7 U11.D2 | length 207
  Top Layer w3: U11.D2@562.01,844.49 576.77,829.72 576.77,722.07 557.55,702.84 557.55,665.7 566.97,656.28 U10.B7@566.97,655.43
D12: U10.A7 U11.E2 | length 191.8
  Top Layer w3: U10.A7@566.97,675.12 566.97,703.78 606.3,743.11 606.3,829.72 U11.E2@591.54,844.49
D13: U10.A8 U11.F2 | length 198.3
  Top Layer w3: U10.A8@586.65,675.12 586.65,704.76 638.78,756.89 638.78,826.77 U11.F2@621.06,844.49
D14: U10.D8 U11.F1 | length 221
  Top Layer w3: U10.D8@586.65,616.06 577.23,625.48 577.23,703.83 612.3,738.89 612.3,791.43 621.06,800.2 U11.F1@621.06,814.96
D15: U10.B8 U11.G1 | length 186
  Top Layer w3: U10.B8@586.65,655.43 596.07,664.85 596.07,704.34 650.59,758.86 U11.G1@650.59,814.96
D_N: J3.2 U15.1 U17.7 | length 531.4
  Top Layer w6: v1(2967.52,616.14) 2976.38,607.28 U17.7@2976.38,572.83
  Bottom Layer w6: v1(2967.52,616.14) 2975.72,624.34 2975.72,640.59 2996.88,661.75 3030.35,661.75 3055.45,636.65 3055.45,600.55 3007.78,552.88 3007.78,400.84 ; 3008.53,400.09 3013.78,394.84 J3.2@3013.78,336.61 ; 3009.23,535.21 3009.19,535.26 ; 3009.28,535.26 3024.46,520.08 U15.1@3039.37,520.08
D_P: J3.3 U15.6 U17.8 | length 462.2
  Top Layer w6: U17.8@2996.06,572.83 2996.06,607.28 v1(3004.92,616.14)
  Bottom Layer w6: U15.6@2956.69,520.08 2971.6,520.08 2986.78,535.26 ; J3.3@2982.28,336.61 2982.28,394.84 2988.28,400.84 2988.28,563.09 3034.45,609.25 3034.45,627.95 3021.65,640.75 3005.58,640.75 2996.72,631.89 2996.72,624.34 v1(3004.92,616.14) ; 2986.83,535.21 2986.87,535.26
DIN: U10.L14 U17.40 | length 2741.3
  Top Layer w5: U10.L14@704.76,478.27 954.39,478.27 1103.57,627.45 1103.57,705.71 1133.44,735.57 v1(1144.68,735.57)
  Top Layer w8: v1(2675.2,962.6) 2684.66,962.6 2791.59,1069.54 2972.79,1069.54 3015.75,1026.57 U17.40@3015.75,929.13
  Bottom Layer w8: v1(1144.68,735.57) 1326.31,735.57 1544.14,953.39 2351.01,953.39 2380.37,924.04 2627.32,924.04 2665.88,962.6 v1(2675.2,962.6)
DONE: DS5.1 R25.2 U10.N14 | length 299.7
  Top Layer w5: U10.N14@704.76,438.9 739.17,404.49 739.17,363.03 R25.2@809.06,293.15 813,293.15 833.66,272.48 833.66,224.09 DS5.1@813,203.42
DOUT: U10.K14 U17.39 | length 2777.7
  Top Layer w5: U10.K14@704.76,497.95 954.28,497.95 1089.57,633.25 1089.57,738.19 1120.76,769.37 v1(1144.68,769.37)
  Top Layer w8: v1(2675.2,984.25) 2690.75,984.25 2787.04,1080.54 2981.66,1080.54 3035.43,1026.77 U17.39@3035.43,929.13
  Bottom Layer w8: v1(1144.68,769.37) 1344.56,769.37 1539.58,964.39 2355.57,964.39 2384.92,935.04 2616.14,935.04 2665.35,984.25 v1(2675.2,984.25)
FLASH_CS: R24.1 U9.1 U10.P2 | length 203.9
  Top Layer w5: R24.1@332.68,323.82 338.58,329.72 U9.1@393.7,329.72 427.76,329.72 443.03,345 443.03,393.7 U10.P2@468.54,419.21
FTDI_SPI_CLK: U10.J14 U17.38 | length 2785.5
  Top Layer w5: U10.J14@704.76,517.64 954.16,517.64 1075.57,639.05 1075.57,753.88 1124.86,803.17 v1(1144.68,803.17)
  Top Layer w8: v1(2675.2,1003.94) 2694.88,1003.94 2782.48,1091.54 2986.22,1091.54 3055.12,1022.64 U17.38@3055.12,929.13
  Bottom Layer w8: v1(1144.68,803.17) 1362.8,803.17 1535.02,975.39 2355.32,975.39 2393.7,1013.78 2665.35,1013.78 v1(2675.2,1003.94)